# Altium PCB PCB1.PcbDoc
Units mm, origin at the board's own origin, x right, y up, seen from the top; angles counter-clockwise.
Board outline 95 x 95 mm, 2 copper layers (Top Layer, Bottom Layer); 241 components, 0 nets, 750 pads, 0 vias.
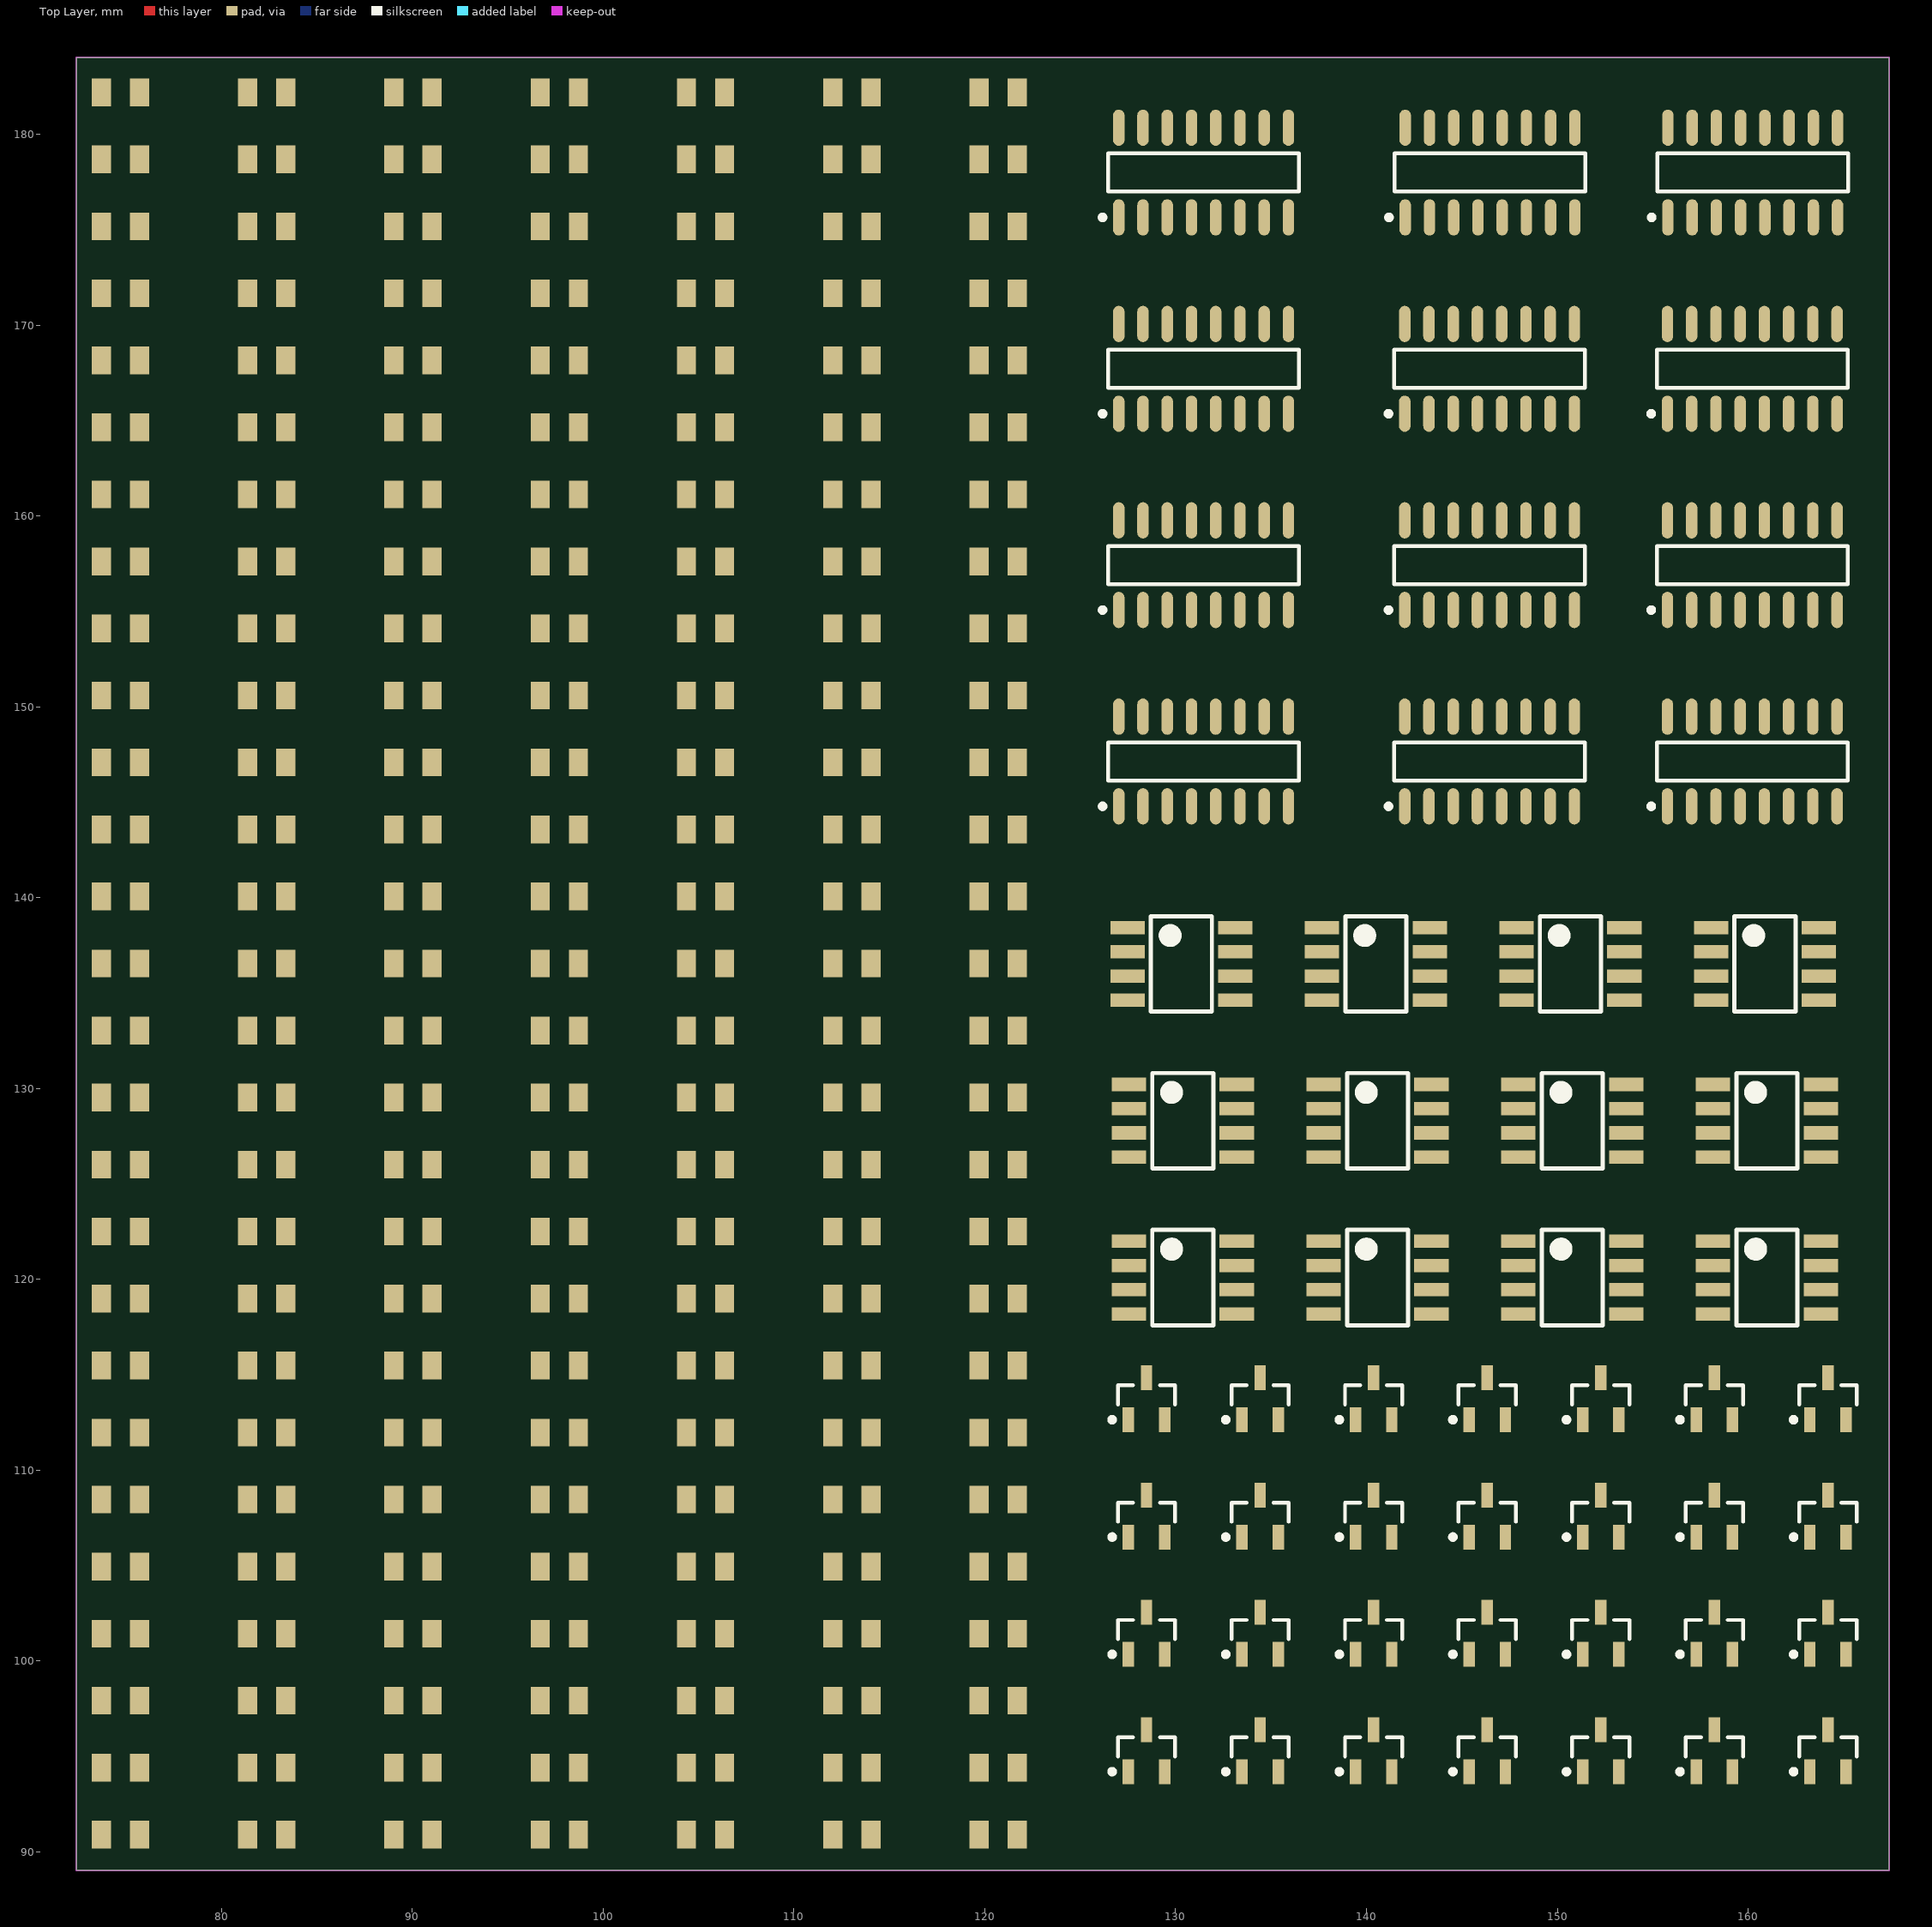
[diagram p0: Top Layer view]
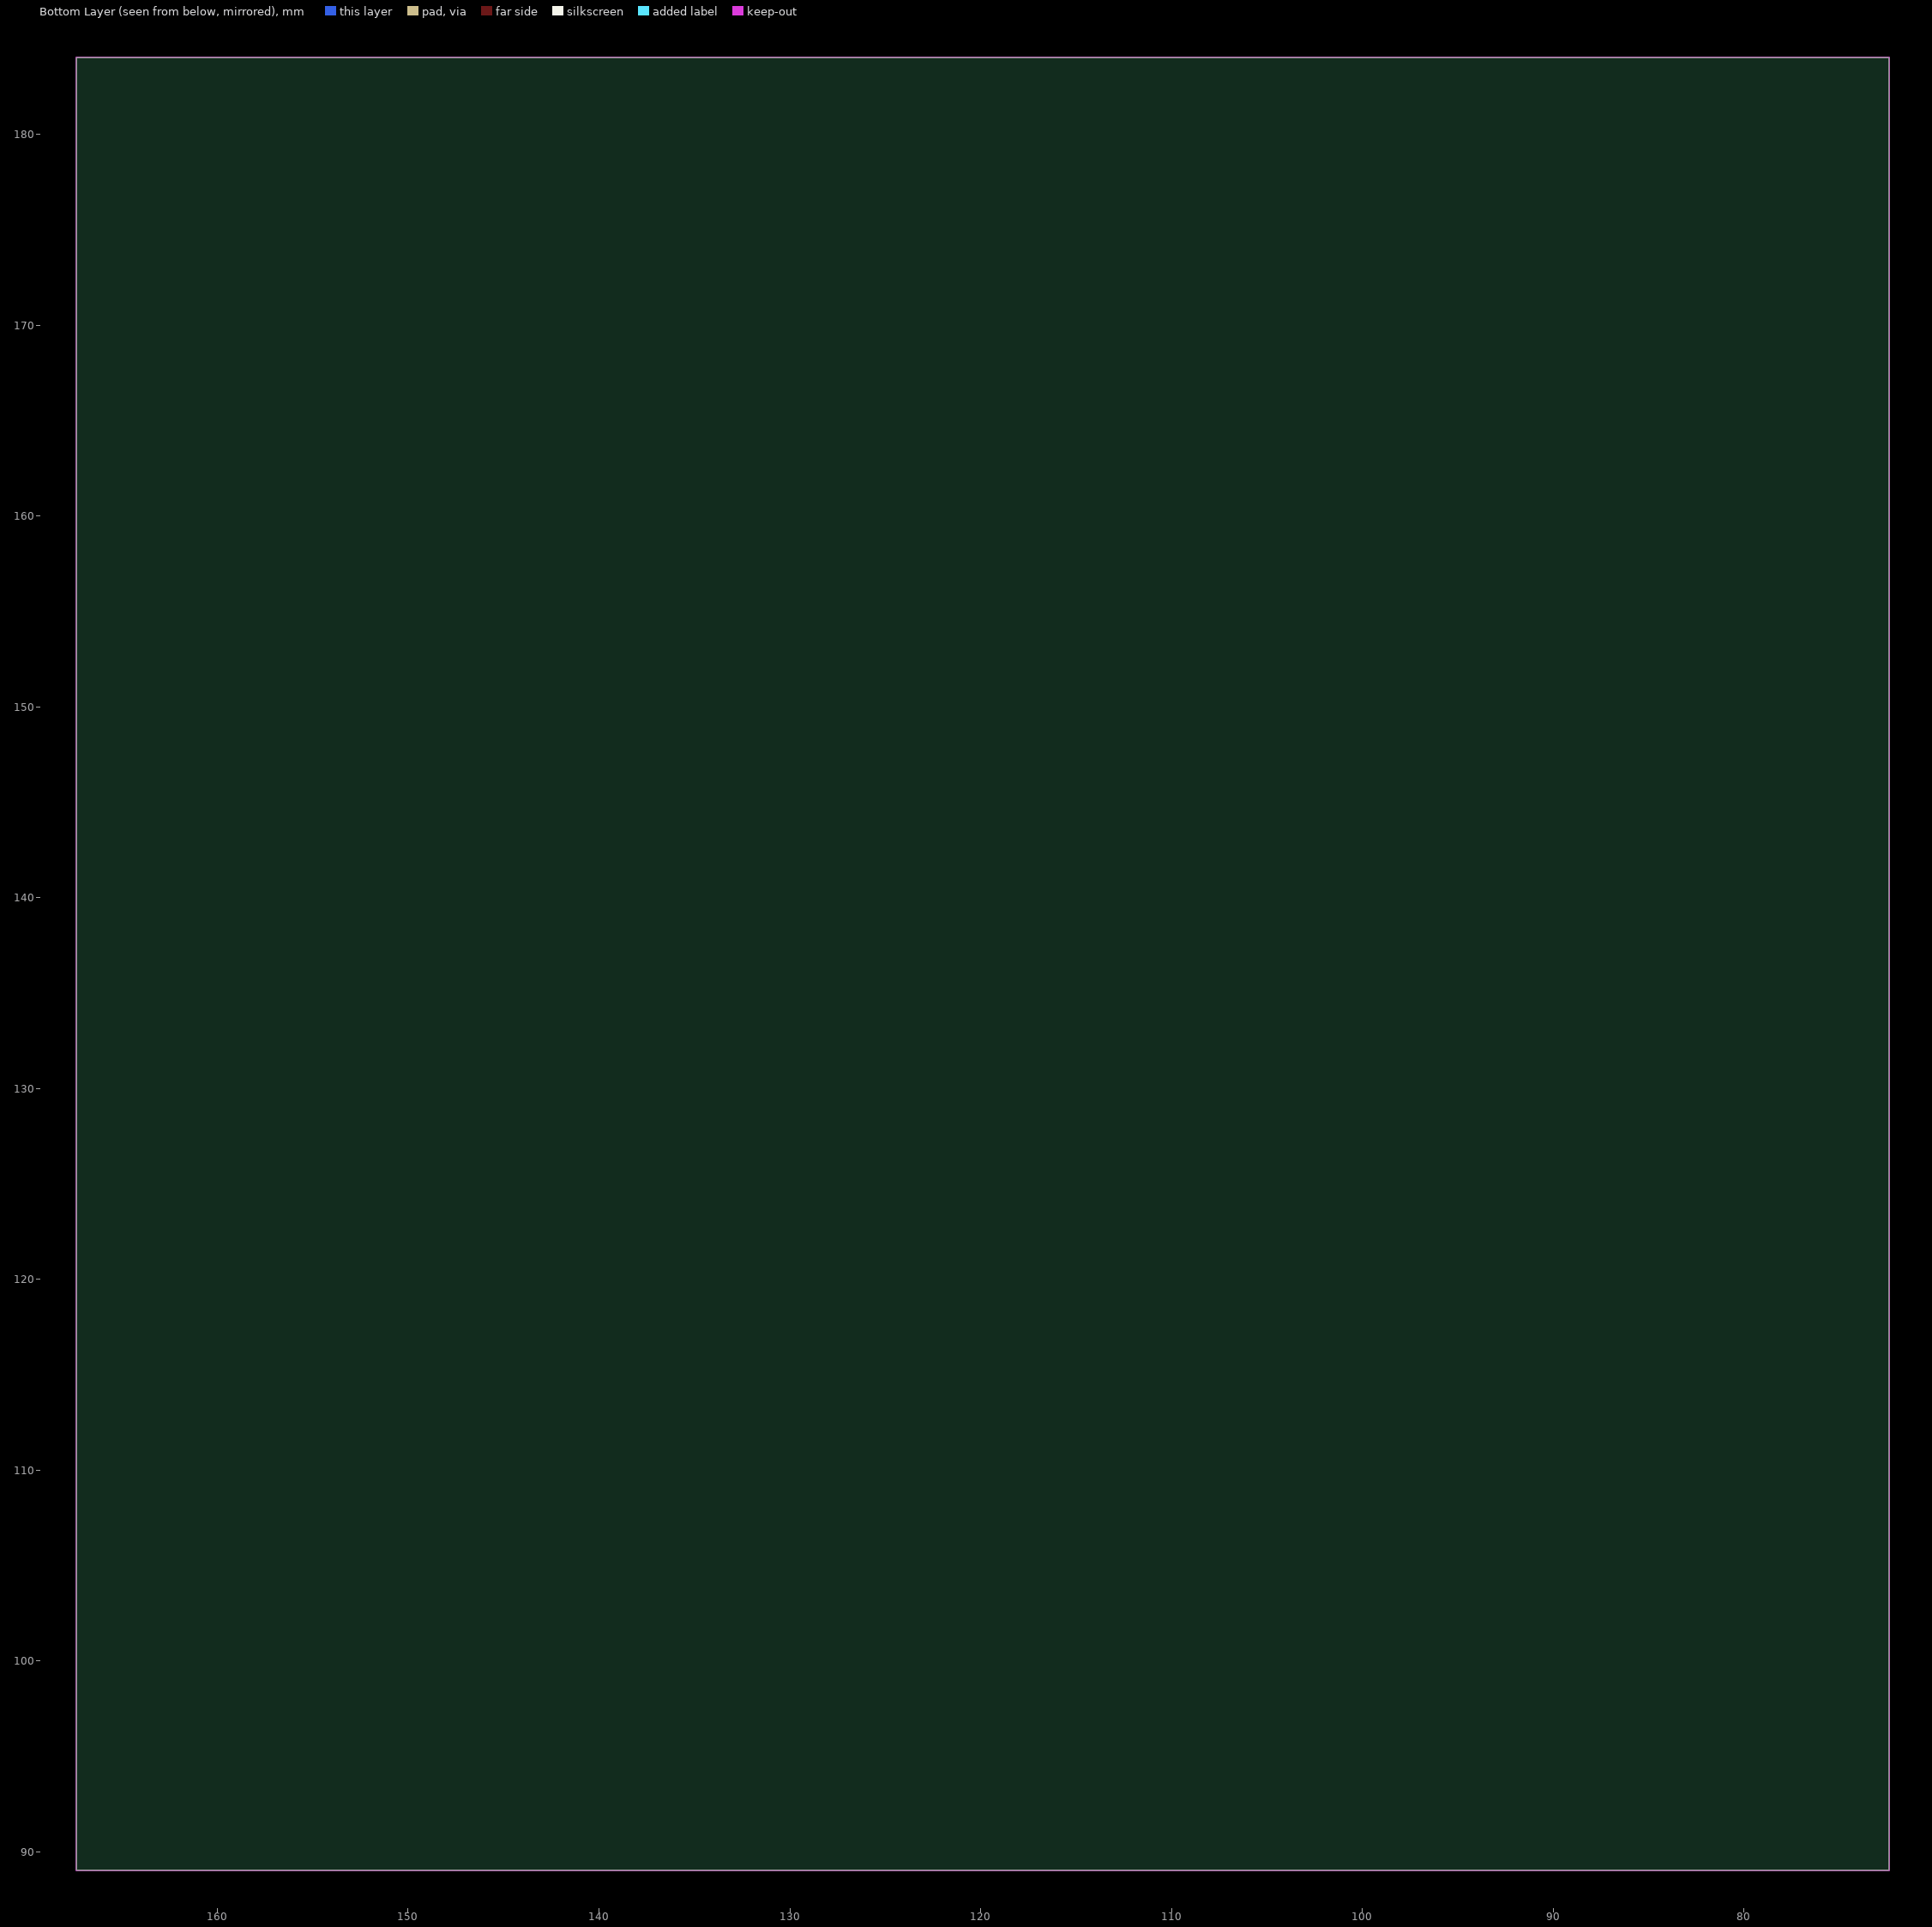
[diagram p1: Bottom Layer view, seen from below]

## Layer stack, top to bottom
Top Solder: solder mask 0.0102, Solder Resist, Dk 3.5
Top Layer: signal copper 0.0356
Dielectric 1: dielectric 0.32, FR-4, Dk 4.8
Bottom Layer: signal copper 0.0356
Bottom Solder: solder mask 0.0102, Solder Resist, Dk 3.5

## Board outline
72.39,89.027 167.39,89.027 167.39,184.027 72.39,184.027

## Design rules (kind name [scope] priority, off if disabled: settings)
Clearance [All] p1: gap=0.254 ignorepadtopadclearanceinfootprint=FALSE except(0: Arc-Hole Track-Hole SMDPad-Hole THPad-Hole Via-Hole Fill-Hole Poly-Hole Region-Hole Text-Hole)
PolygonConnect [All] p1: connectstyle=Relief reliefconductorwidth=0.254 reliefentries=4 polygonreliefangle="90 Angle" airgapwidth=0.254
RoutingVias [All] p1: holewidth=0.711 width=1.27 viastyle="Through Hole" minholewidth=0.711 minwidth=1.27 maxholewidth=0.711 maxwidth=1.27
SolderMaskExpansion [All] p1: expansion=0.102
Width [All] p1: maxlimit=0.254 minlimit=0.254 preferedwidth=0.254
30 further rules are at their usual default settings.

## Components (designator, comment, footprint, x,y, rotation, side; value= is the part's Value field where it differs from the comment)
? "Comment" SOT23_L 164.186,113.741 r90 top
? "Comment" SOT23_L 164.186,107.594 r90 top
? "Comment" SOT23_L 164.186,101.448 r90 top
? "Comment" SOT23_L 164.186,95.301 r90 top
? "Comment" SOT23_L 158.234,113.741 r90 top
? "Comment" SOT23_L 158.234,107.594 r90 top
? "Comment" SOT23_L 158.234,101.448 r90 top
? "Comment" SOT23_L 158.234,95.301 r90 top
? "Comment" SOT23_L 152.281,113.741 r90 top
? "Comment" SOT23_L 152.281,107.594 r90 top
? "Comment" SOT23_L 152.281,101.448 r90 top
? "Comment" SOT23_L 152.281,95.301 r90 top
? "Comment" SOT23_L 146.329,113.741 r90 top
? "Comment" SOT23_L 146.329,107.594 r90 top
? "Comment" SOT23_L 146.329,101.448 r90 top
? "Comment" SOT23_L 146.329,95.301 r90 top
? "Comment" SOT23_L 140.377,113.741 r90 top
? "Comment" SOT23_L 140.377,107.594 r90 top
? "Comment" SOT23_L 140.377,101.448 r90 top
? "Comment" SOT23_L 140.377,95.301 r90 top
? "Comment" SOT23_L 134.425,113.741 r90 top
? "Comment" SOT23_L 134.425,107.594 r90 top
? "Comment" SOT23_L 134.425,101.448 r90 top
? "Comment" SOT23_L 134.425,95.301 r90 top
? "Comment" SOT23_L 128.473,95.301 r90 top
? "Comment" SOT23_L 128.473,101.448 r90 top
? "Comment" SOT23_L 128.473,107.594 r90 top
? "Comment" SOT23_L 128.473,113.741 r90 top
? "Comment" SOIC8 130.378,120.091 r0 top
? "Comment" SOIC8 140.581,120.091 r0 top
? "Comment" SOIC8 150.783,120.091 r0 top
? "Comment" SOIC8 160.985,120.091 r0 top
? "Comment" SOIC8 130.378,128.308 r0 top
? "Comment" SOIC8 140.581,128.308 r0 top
? "Comment" SOIC8 150.783,128.308 r0 top
? "Comment" SOIC8 160.985,128.308 r0 top
? "Comment" SOIC8 160.884,136.525 r0 top
? "Comment" SOIC8 150.69,136.525 r0 top
? "Comment" SOIC8 140.496,136.525 r0 top
? "Comment" SOIC8 130.302,136.525 r0 top
? "Comment" SO-16_L 160.243,177.997 r90 top
? "Comment" SO-16_L 160.218,167.71 r90 top
? "Comment" SO-16_L 160.218,157.423 r90 top
? "Comment" SO-16_L 160.218,147.135 r90 top
? "Comment" SO-16_L 146.476,177.997 r90 top
? "Comment" SO-16_L 146.451,167.71 r90 top
? "Comment" SO-16_L 146.451,157.423 r90 top
? "Comment" SO-16_L 146.451,147.135 r90 top
? "Comment" SO-16_L 131.465,147.135 r90 top
? "Comment" SO-16_L 131.465,157.423 r90 top
? "Comment" SO-16_L 131.465,167.71 r90 top
? "Comment" SO-16_L 131.465,177.997 r90 top
? "Comment" RES0805 120.7,182.2 r0 top
? "Comment" RES0805 120.7,178.688 r0 top
? "Comment" RES0805 120.7,175.177 r0 top
? "Comment" RES0805 120.7,164.642 r0 top
? "Comment" RES0805 120.7,168.154 r0 top
? "Comment" RES0805 120.7,171.665 r0 top
? "Comment" RES0805 120.7,154.108 r0 top
? "Comment" RES0805 120.7,157.619 r0 top
? "Comment" RES0805 120.7,161.131 r0 top
? "Comment" RES0805 120.7,143.573 r0 top
? "Comment" RES0805 120.7,147.085 r0 top
? "Comment" RES0805 120.7,150.596 r0 top
? "Comment" RES0805 120.7,133.038 r0 top
? "Comment" RES0805 120.7,136.55 r0 top
? "Comment" RES0805 120.7,140.061 r0 top
? "Comment" RES0805 120.7,122.504 r0 top
? "Comment" RES0805 120.7,126.015 r0 top
? "Comment" RES0805 120.7,129.527 r0 top
? "Comment" RES0805 120.7,111.969 r0 top
? "Comment" RES0805 120.7,115.481 r0 top
? "Comment" RES0805 120.7,118.992 r0 top
? "Comment" RES0805 120.7,104.946 r0 top
? "Comment" RES0805 120.7,108.458 r0 top
? "Comment" RES0805 120.7,101.435 r0 top
? "Comment" RES0805 120.7,90.9 r0 top
? "Comment" RES0805 120.7,94.412 r0 top
? "Comment" RES0805 120.7,97.923 r0 top
? "Comment" RES0805 113.033,182.2 r0 top
? "Comment" RES0805 113.033,178.688 r0 top
? "Comment" RES0805 113.033,175.177 r0 top
? "Comment" RES0805 113.033,164.642 r0 top
? "Comment" RES0805 113.033,168.154 r0 top
? "Comment" RES0805 113.033,171.665 r0 top
? "Comment" RES0805 113.033,154.108 r0 top
? "Comment" RES0805 113.033,157.619 r0 top
? "Comment" RES0805 113.033,161.131 r0 top
? "Comment" RES0805 113.033,143.573 r0 top
? "Comment" RES0805 113.033,147.085 r0 top
? "Comment" RES0805 113.033,150.596 r0 top
? "Comment" RES0805 113.033,133.038 r0 top
? "Comment" RES0805 113.033,136.55 r0 top
? "Comment" RES0805 113.033,140.061 r0 top
? "Comment" RES0805 113.033,122.504 r0 top
? "Comment" RES0805 113.033,126.015 r0 top
? "Comment" RES0805 113.033,129.527 r0 top
? "Comment" RES0805 113.033,111.969 r0 top
? "Comment" RES0805 113.033,115.481 r0 top
? "Comment" RES0805 113.033,118.992 r0 top
? "Comment" RES0805 113.033,104.946 r0 top
? "Comment" RES0805 113.033,108.458 r0 top
? "Comment" RES0805 113.033,101.435 r0 top
? "Comment" RES0805 113.033,90.9 r0 top
? "Comment" RES0805 113.033,94.412 r0 top
? "Comment" RES0805 113.033,97.923 r0 top
? "Comment" RES0805 105.367,182.2 r0 top
? "Comment" RES0805 105.367,178.688 r0 top
? "Comment" RES0805 105.367,175.177 r0 top
? "Comment" RES0805 105.367,164.642 r0 top
? "Comment" RES0805 105.367,168.154 r0 top
? "Comment" RES0805 105.367,171.665 r0 top
? "Comment" RES0805 105.367,154.108 r0 top
? "Comment" RES0805 105.367,157.619 r0 top
? "Comment" RES0805 105.367,161.131 r0 top
? "Comment" RES0805 105.367,143.573 r0 top
? "Comment" RES0805 105.367,147.085 r0 top
? "Comment" RES0805 105.367,150.596 r0 top
? "Comment" RES0805 105.367,133.038 r0 top
? "Comment" RES0805 105.367,136.55 r0 top
? "Comment" RES0805 105.367,140.061 r0 top
? "Comment" RES0805 105.367,122.504 r0 top
? "Comment" RES0805 105.367,126.015 r0 top
? "Comment" RES0805 105.367,129.527 r0 top
? "Comment" RES0805 105.367,111.969 r0 top
? "Comment" RES0805 105.367,115.481 r0 top
? "Comment" RES0805 105.367,118.992 r0 top
? "Comment" RES0805 105.367,104.946 r0 top
? "Comment" RES0805 105.367,108.458 r0 top
? "Comment" RES0805 105.367,101.435 r0 top
? "Comment" RES0805 105.367,90.9 r0 top
? "Comment" RES0805 105.367,94.412 r0 top
? "Comment" RES0805 105.367,97.923 r0 top
? "Comment" RES0805 97.7,182.2 r0 top
? "Comment" RES0805 97.7,178.688 r0 top
? "Comment" RES0805 97.7,175.177 r0 top
? "Comment" RES0805 97.7,164.642 r0 top
? "Comment" RES0805 97.7,168.154 r0 top
? "Comment" RES0805 97.7,171.665 r0 top
? "Comment" RES0805 97.7,154.108 r0 top
? "Comment" RES0805 97.7,157.619 r0 top
? "Comment" RES0805 97.7,161.131 r0 top
? "Comment" RES0805 97.7,143.573 r0 top
? "Comment" RES0805 97.7,147.085 r0 top
? "Comment" RES0805 97.7,150.596 r0 top
? "Comment" RES0805 97.7,133.038 r0 top
? "Comment" RES0805 97.7,136.55 r0 top
? "Comment" RES0805 97.7,140.061 r0 top
? "Comment" RES0805 97.7,122.504 r0 top
? "Comment" RES0805 97.7,126.015 r0 top
? "Comment" RES0805 97.7,129.527 r0 top
? "Comment" RES0805 97.7,111.969 r0 top
? "Comment" RES0805 97.7,115.481 r0 top
? "Comment" RES0805 97.7,118.992 r0 top
? "Comment" RES0805 97.7,104.946 r0 top
? "Comment" RES0805 97.7,108.458 r0 top
? "Comment" RES0805 97.7,101.435 r0 top
? "Comment" RES0805 97.7,90.9 r0 top
? "Comment" RES0805 97.7,94.412 r0 top
? "Comment" RES0805 97.7,97.923 r0 top
? "Comment" RES0805 90.033,182.2 r0 top
? "Comment" RES0805 90.033,178.688 r0 top
? "Comment" RES0805 90.033,175.177 r0 top
? "Comment" RES0805 90.033,164.642 r0 top
? "Comment" RES0805 90.033,168.154 r0 top
? "Comment" RES0805 90.033,171.665 r0 top
? "Comment" RES0805 90.033,154.108 r0 top
? "Comment" RES0805 90.033,157.619 r0 top
? "Comment" RES0805 90.033,161.131 r0 top
? "Comment" RES0805 90.033,143.573 r0 top
? "Comment" RES0805 90.033,147.085 r0 top
? "Comment" RES0805 90.033,150.596 r0 top
? "Comment" RES0805 90.033,133.038 r0 top
? "Comment" RES0805 90.033,136.55 r0 top
? "Comment" RES0805 90.033,140.061 r0 top
? "Comment" RES0805 90.033,122.504 r0 top
? "Comment" RES0805 90.033,126.015 r0 top
? "Comment" RES0805 90.033,129.527 r0 top
? "Comment" RES0805 90.033,111.969 r0 top
? "Comment" RES0805 90.033,115.481 r0 top
? "Comment" RES0805 90.033,118.992 r0 top
? "Comment" RES0805 90.033,104.946 r0 top
? "Comment" RES0805 90.033,108.458 r0 top
? "Comment" RES0805 90.033,101.435 r0 top
? "Comment" RES0805 90.033,90.9 r0 top
? "Comment" RES0805 90.033,94.412 r0 top
? "Comment" RES0805 90.033,97.923 r0 top
? "Comment" RES0805 82.367,182.2 r0 top
? "Comment" RES0805 82.367,178.688 r0 top
? "Comment" RES0805 82.367,175.177 r0 top
? "Comment" RES0805 82.367,164.642 r0 top
? "Comment" RES0805 82.367,168.154 r0 top
? "Comment" RES0805 82.367,171.665 r0 top
? "Comment" RES0805 82.367,154.108 r0 top
? "Comment" RES0805 82.367,157.619 r0 top
? "Comment" RES0805 82.367,161.131 r0 top
? "Comment" RES0805 82.367,143.573 r0 top
? "Comment" RES0805 82.367,147.085 r0 top
? "Comment" RES0805 82.367,150.596 r0 top
? "Comment" RES0805 82.367,133.038 r0 top
? "Comment" RES0805 82.367,136.55 r0 top
? "Comment" RES0805 82.367,140.061 r0 top
? "Comment" RES0805 82.367,122.504 r0 top
? "Comment" RES0805 82.367,126.015 r0 top
? "Comment" RES0805 82.367,129.527 r0 top
? "Comment" RES0805 82.367,111.969 r0 top
? "Comment" RES0805 82.367,115.481 r0 top
? "Comment" RES0805 82.367,118.992 r0 top
? "Comment" RES0805 82.367,104.946 r0 top
? "Comment" RES0805 82.367,108.458 r0 top
? "Comment" RES0805 82.367,101.435 r0 top
? "Comment" RES0805 82.367,90.9 r0 top
? "Comment" RES0805 82.367,94.412 r0 top
? "Comment" RES0805 82.367,97.923 r0 top
? "Comment" RES0805 74.7,97.923 r0 top
? "Comment" RES0805 74.7,94.412 r0 top
? "Comment" RES0805 74.7,90.9 r0 top
? "Comment" RES0805 74.7,101.435 r0 top
? "Comment" RES0805 74.7,108.458 r0 top
? "Comment" RES0805 74.7,104.946 r0 top
? "Comment" RES0805 74.7,118.992 r0 top
? "Comment" RES0805 74.7,115.481 r0 top
? "Comment" RES0805 74.7,111.969 r0 top
? "Comment" RES0805 74.7,129.527 r0 top
? "Comment" RES0805 74.7,126.015 r0 top
? "Comment" RES0805 74.7,122.504 r0 top
? "Comment" RES0805 74.7,140.061 r0 top
? "Comment" RES0805 74.7,136.55 r0 top
? "Comment" RES0805 74.7,133.038 r0 top
? "Comment" RES0805 74.7,150.596 r0 top
? "Comment" RES0805 74.7,147.085 r0 top
? "Comment" RES0805 74.7,143.573 r0 top
? "Comment" RES0805 74.7,161.131 r0 top
? "Comment" RES0805 74.7,157.619 r0 top
? "Comment" RES0805 74.7,154.108 r0 top
? "Comment" RES0805 74.7,171.665 r0 top
? "Comment" RES0805 74.7,168.154 r0 top
? "Comment" RES0805 74.7,164.642 r0 top
? "Comment" RES0805 74.7,175.177 r0 top
? "Comment" RES0805 74.7,178.688 r0 top
? "Comment" RES0805 74.7,182.2 r0 top

## Footprints (in the part's own frame and the unit in brackets; to place one, negate y for a bottom-side part, rotate by r counter-clockwise, add the part's x,y. Pads: shape width x height; smd on the part's side, far side on the other; paste and mask are expansions set on the pad)
RES0805 [mm] "Chip Resistor, 2-Leads, Body 2,00x1,20mm, IPC Medium Density"
  rect 1x1.45 smd: 1(-1,0) 2(1,0)
  body extent -1,-0.6 1,0.6, height 0.4
SO-16_L [mm] "SOIC, 16-Leads, Body 9.9x3.9mm, Pitch 1.27mm, IPC High Density"
  oval 1.9x0.6 smd: 1(-2.35,4.445) 2(-2.35,3.175) 3(-2.35,1.905) 4(-2.35,0.635) 5(-2.35,-0.635) 6(-2.35,-1.905) 7(-2.35,-3.175) 8(-2.35,-4.445) 9(2.35,-4.445) 10(2.35,-3.175) 11(2.35,-1.905) 12(2.35,-0.635) 13(2.35,0.635) 14(2.35,1.905) 15(2.35,3.175) 16(2.35,4.445)
  silkscreen extent -2.47,-5 1,5.42, body extent -2.95,-4.96 3.04,4.94, height 1.4
SOIC8 [mm] "SOIC, 8-Leads, Body 4,90x3,90mm, Pitch 1,27mm, IPC Medium Density"
  rect 1.8x0.7 smd: 1(-2.825,1.905) 2(-2.825,0.635) 3(-2.825,-0.635) 4(-2.825,-1.905) 5(2.825,-1.905) 6(2.825,-0.635) 7(2.825,0.635) 8(2.825,1.905)
  silkscreen extent -1.6,-2.5 1.6,2.5, body extent -3,-2.5 3,2.5, height 1.75
SOT23_L [mm] "SOT23, 3-Leads, Body 2.9x1.3 mm, Pitch 0.95 mm, IPC High Density"
  rect 1.3x0.6 smd: 1(-1.1,0.95) 2(-1.1,-0.95) 3(1.1,0)
  silkscreen extent -1.22,-1.5 0.7,1.92, body extent -1.17,-1.46 1.17,1.46, height 1

## Nets (pads, with @x,y where several pads share a name; then routed paths per layer and width w, separated by ;. In a path a pad name is that pad's centre, name@x,y a point inside that pad or via, vN(x,y) a via of type N, cw(c..) or ccw(c..) an arc to the next point about the centre after c; other vN are vias at no path point)
pads on no net: ?.1 ?.2 ?.3 ?.4 ?.5 ?.6 ?.7 ?.8 ?.9 ?.10 ?.11 ?.12 ?.13 ?.14 ?.15 ?.16

## Keep-outs
Keep-Out Layer:
  the board outline again, w0.1